# Allegro board ATMEGA.brd
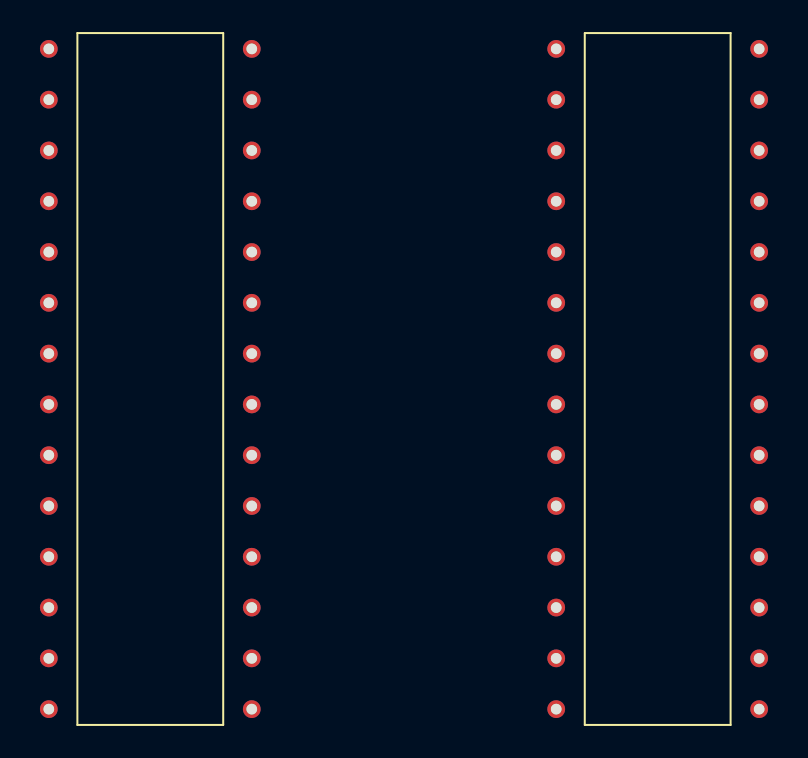
[diagram p0: board, top side]
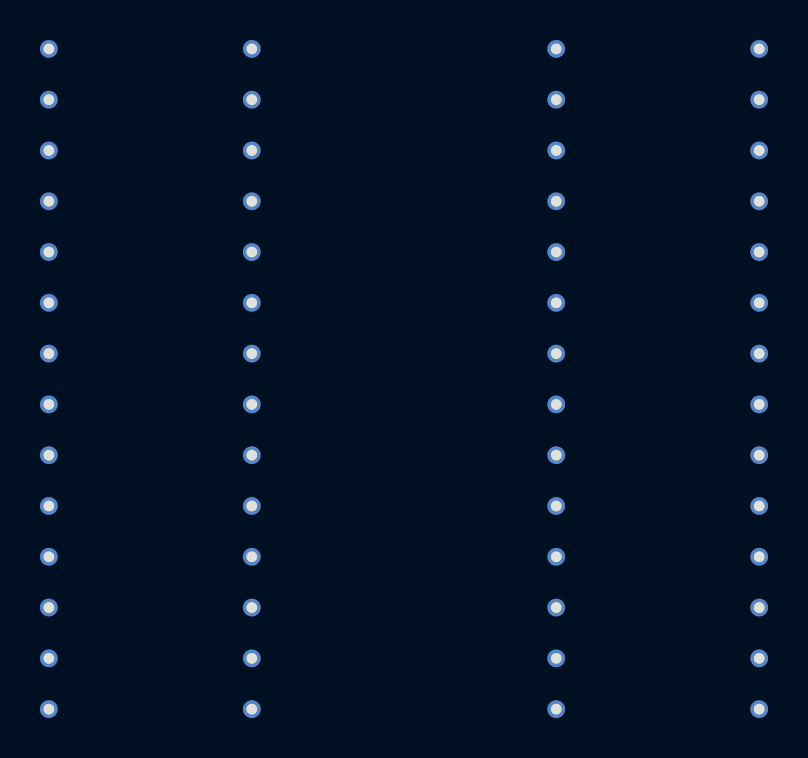
[diagram p1: board, bottom side, seen from below]

No outline. copper layers: TOP, BOTTOM. Coordinates in mm from the lowest, leftmost part position.

## Placement (name value [footprint] x y rotation side)
IC2  ATmega328P-PU  [DIP328]  0 0 0 top
IC3  ATmega328P-PU  [DIP328]  25.4 0 0 top

## Library data of the parts
IC2 IC3 = ATMega8-TQFP32_1

## Footprints (pads in the part's own frame, mm; a bottom-side part is the same pattern mirrored in y, then rotated)
DIP328
  round 0.889 hole 0.533: 1(-5.08,16.51) 2(-5.08,13.97) 3(-5.08,11.43) 4(-5.08,8.89) 5(-5.08,6.35) 6(-5.08,3.81) 7(-5.08,1.27) 8(-5.08,-1.27) 9(-5.08,-3.81) 10(-5.08,-6.35) 11(-5.08,-8.89) 12(-5.08,-11.43) 13(-5.08,-13.97) 14(-5.08,-16.51) 15(5.08,-16.51) 16(5.08,-13.97) 17(5.08,-11.43) 18(5.08,-8.89) 19(5.08,-6.35) 20(5.08,-3.81) 21(5.08,-1.27) 22(5.08,1.27) 23(5.08,3.81) 24(5.08,6.35) 25(5.08,8.89) 26(5.08,11.43) 27(5.08,13.97) 28(5.08,16.51)

## Nets
N03163: IC2.19((SCK)PB5) IC3.1(RESET(PC1/DW))
N03167: IC2.16((SS)PB2) IC3.10(XTAL2)
N03196: IC2.14((ICP)PB0) IC3.9(XTAL1)
N03200: IC2.28((ADC5)PC5) IC3.21(AREF)
N03204: IC2.27((ADC4)PC4) IC3.20(AVCC)
N03214: IC2.26((ADC3)PC3) IC3.22(AGND)
N03218: IC2.24((ADC1)PC1) IC3.7(VCC)
N03228: IC2.23((ADC0)PC0)) IC3.8(GND)

Pads without a net: IC2 1 2 3 4 5 6 7 8 9 10 11 12 13 15 17 18 20 21 22 25; IC3 2 3 4 5 6 11 12 13 14 15 16 17 18 19 23 24 25 26 27 28
